# Altium PCB MainBoard.PcbDoc (part 2 of 3)
Units mil, origin at the board's own origin, x right, y up, seen from the top; angles counter-clockwise.
Board outline 11417.32 x 3858.27 mil, 2 copper layers (Top Layer, Bottom Layer); 222 components, 205 nets, 1642 pads, 0 vias.
Unrouted connection lines stored in the file: 802.
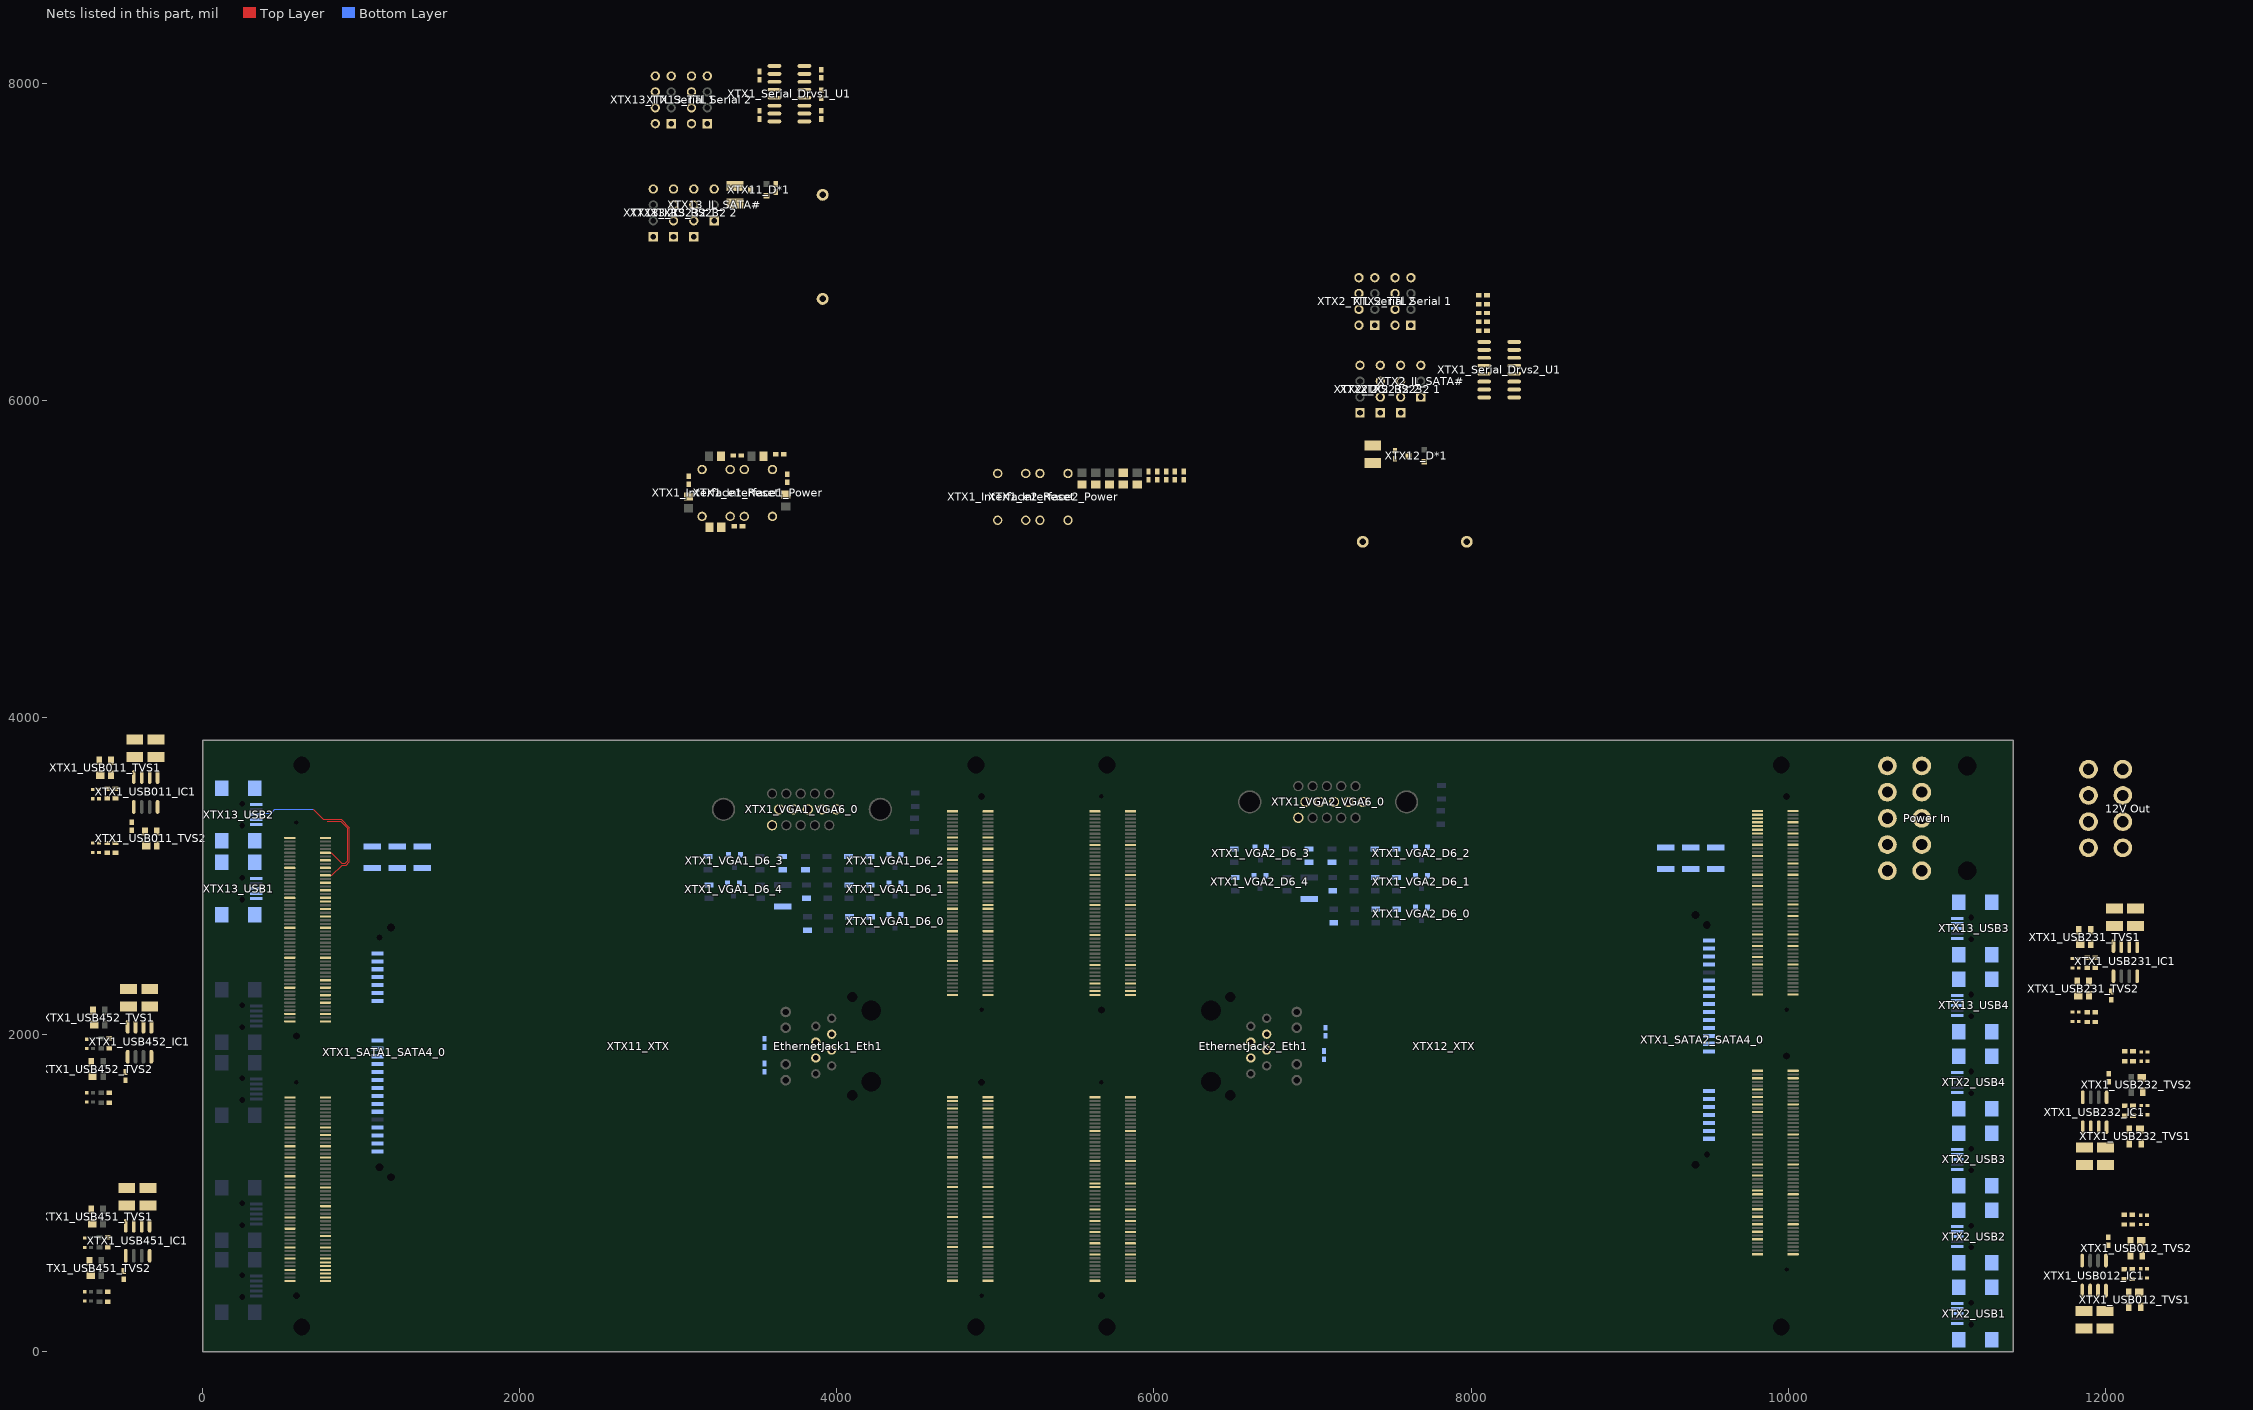
[diagram p2: the nets of this part, all layers, seen from the top]

## Components (designator, comment, footprint, x,y, rotation, side; value= is the part's Value field where it differs from the comment) (continued)
XTX13_USB1 "UX60-MB-5ST" UX60-MB-5ST 378,2922.48 r90 bottom (schematic designator USB1)
XTX13_USB2 "UX60-MB-5ST" UX60-MB-5ST 378,3389.15 r90 bottom (schematic designator USB2)
XTX13_USB3 "UX60-MB-5ST" UX60-MB-5ST 11025.75,2670.85 r270 bottom (schematic designator USB3)
XTX13_USB4 "UX60-MB-5ST" UX60-MB-5ST 11025.75,2185.14 r270 bottom (schematic designator USB4)
XTX13_USB5 "UX60-MB-5ST" UX60-MB-5ST 378,415.82 r90 bottom (schematic designator USB5)
XTX13_USB6 "UX60-MB-5ST" UX60-MB-5ST 378,869.15 r90 bottom (schematic designator USB6)

## Footprints (in the part's own frame and the unit in brackets; to place one, negate y for a bottom-side part, rotate by r counter-clockwise, add the part's x,y. Pads: shape width x height; smd on the part's side, far side on the other; paste and mask are expansions set on the pad)
"8-Pin SOIC" [mm] "SOIC, 8-Leads, Body 6.0x4.0mm (max), Pitch 1.27mm, IPC Medium Density"
  oval 2.2x0.6 smd: 1(-2.4,1.905) 2(-2.4,0.635) 3(-2.4,-0.635) 4(-2.4,-1.905) 5(2.4,-1.905) 6(2.4,-0.635) 7(2.4,0.635) 8(2.4,1.905)
  silkscreen extent -2.79,-3 1.91,3, body extent -1.99,-2.99 1.99,2.99, height 1.73
"8-POS 5569 Mini-Fit Jr 2" [mm] "Right Angle w/ Press-Fit Pegs"
  round 3 hole 1.8: 1(0,0) 2(4.2,0) 3(8.4,0) 4(12.6,0) 5(0,5.5) 6(4.2,5.5) 7(8.4,5.5) 8(12.6,5.5)
  round 0 hole 3 unplated: ""(0,-7.3) ""(12.6,-7.3)
  silkscreen extent -2.83,-14.1 15.9,7.25, body extent -2.65,-13.95 15.75,5.99, height 11.4
"10-Pos 5569 Mini-Fit Jr 2" [mm] "Right Angle w/ Press-Fit Pegs"
  round 3 hole 1.8: 1(0,0) 2(4.2,0) 3(8.4,0) 4(12.6,0) 5(16.8,0) 6(0,5.5) 7(4.2,5.5) 8(8.4,5.5) 9(12.6,5.5) 10(16.8,5.5)
  round 0 hole 3 unplated: ""(0,-7.3) ""(16.8,-7.3)
  silkscreen extent -3,-14 20.2,7.5, body extent -2.7,-13.87 19.9,6.07, height 11.4
0402 [mm] "Chip Capacitor; Body 1.0 x 0.5 mm (LxW typ)"
  rect 0.9x0.7 smd: 1(-0.65,0) 2(0.65,0)
  silkscreen extent -1.4,-0.25 -1.4,0.25
0402-A [mm] "Chip Inductor; Body 1 x 0.5 mm (LxW typ)"
  rect 0.6x0.5 smd: 1(-0.5,0) 2(0.5,0)
  silkscreen extent -1.1,-0.15 -1.1,0.15
"0805 (2012) Capacitor" [mm] "0805 (2012) Capacitor"
  rect 0.85x1.4 smd: 1(-1.075,0) 2(1.075,0)
  silkscreen extent -1.78,-0.95 1.78,0.95, body extent -1.19,-0.65 1.19,0.65, height 0.85
1005[0402] [mm] "Chip Resistor; Body 1.1 x 0.5 mm (LxW typ)"
  rect 0.9x0.7 smd: 1(-0.65,0) 2(0.65,0)
"1210 (3225) Capacitor" [mm] "1210 (3225) Capacitor"
  rect 0.95x2.8 smd: 1(-1.725,0) 2(1.725,0)
  silkscreen extent -2.45,-1.63 2.45,1.65, body extent -1.83,-1.43 1.83,1.43, height 1.81
48025-0002 [mm] "Modular RJ45 Jack w/ Magnetics & LEDs"
  round 1.5 hole 0.89: 1(-4.445,0) 2(-3.175,2.54) 3(-1.905,0) 4(-0.635,2.54) 5(0.635,0) 6(1.905,2.54) 7(3.175,0) 8(4.445,2.54)
  round 1.7 hole 1.02: 9(-5.461,7.366) 10(-2.921,7.366) 11(2.921,7.366) 12(5.461,7.366)
  round 0 hole 1.63 unplated: ""(-7.874,-3.302) ""(7.874,-3.302)
  round 0 hole 3.18 unplated: ""(-5.715,-6.35) ""(5.715,-6.35)
  silkscreen extent -9,-16.37 9,9, body extent -9.13,-16.5 9.13,9.13, height 14.9
BH600 [mil] "16mm Battery Holder"
  round 75 hole 42: +(-1,-425) -(-1,231)
  silkscreen extent -375,-545 375,375, body extent -375,-545 375,375, height 330
C0805 [mm] "Chip Capacitor; Body 2.0 x 1.2 mm (LxW typ)"
  rect 1.3x1.5 smd: 1(-0.95,0) 2(0.95,0)
  silkscreen extent -1.9,-0.65 -1.9,0.65
C1210 [mm] "Chip Capacitor; Body 3.2 x 2.5 mm (LxW typ)"
  rect 1.6x2.7 smd: 1(-1.4,0) 2(1.4,0)
  silkscreen extent -0.3,-1.25 0.3,1.25
DSub15 [mil] "3 Row 15 Pin Female Right Angle Connector Tyco PN 1734344"
  round 65 hole 46.85: 1(-172.44,-100) 2(-82.28,-100) 3(7.87,-100) 4(98.03,-100) 5(188.19,-100) 6(-217.32,0) 7(-127.17,0) 8(-37.01,0) 9(53.15,0) 10(143.31,0) 11(-172.44,100) 12(-82.28,100) 13(7.87,100) 14(98.03,100) 15(188.19,100)
  round 147 hole 126.77: CGND(-494.49,0) CGND(494.49,0)
  silkscreen extent -606,-177 606,811, body extent -606,-177 606,689, height 502
FSM4JH [mm]
  round 1.5 hole 0.99: 1(-3.75,-2.25) 2(3.75,-2.25) 3(-3.75,2.25) 4(3.75,2.25)
  silkscreen extent -3,-3 3,3, body extent -3.13,-3.13 3.13,3.13, height 5
HDR1X3 [mm] "Connector; Header; 3 Position"
  rect 1.5x1.5 hole 0.9: 1(0,0)
  round 1.5 hole 0.9: 2(2.54,0) 3(5.08,0)
  silkscreen extent -1.27,-1.27 6.35,1.27
HDR1X4 [mm] "Connector; Header; 4 Position"
  rect 1.5x1.5 hole 0.9: 1(0,0)
  round 1.5 hole 0.9: 2(2.54,0) 3(5.08,0) 4(7.62,0)
  silkscreen extent -1.27,-1.27 8.89,1.27
HDR2X4 [mm] "Connector; Header; 4x2 Position"
  rect 1.5x1.5 hole 0.9: 1(0,0)
  round 1.5 hole 0.9: 2(0,2.54) 3(2.54,0) 4(2.54,2.54) 5(5.08,0) 6(5.08,2.54) 7(7.62,0) 8(7.62,2.54)
  silkscreen extent -1.27,-1.27 8.89,3.81
NSO16_N [mm] "16-Pin Small Outline Integrated Circuit 1.27 mm Pitch, IPC Medium Density"
  oval 2.2x0.6 smd: 1(-2.4,4.445) 2(-2.4,3.175) 3(-2.4,1.905) 4(-2.4,0.635) 5(-2.4,-0.635) 6(-2.4,-1.905) 7(-2.4,-3.175) 8(-2.4,-4.445) 9(2.4,-4.445) 10(2.4,-3.175) 11(2.4,-1.905) 12(2.4,-0.635) 13(2.4,0.635) 14(2.4,1.905) 15(2.4,3.175) 16(2.4,4.445)
  silkscreen extent -2.53,-5 0.9,5.42, body extent -1.95,-4.95 1.95,4.95, height 1.75
"R 0805 (2012) RESISTOR" [mm] "0805 (2012) Resistor"
  rect 0.85x1.4 smd: 1(-1.075,0) 2(1.075,0)
  silkscreen extent -1.78,-0.95 1.78,0.95, body extent -1.19,-0.65 1.19,0.65, height 0.85
"R 1210 (3225) RESISTOR" [mm] "1210 (3225) Resistor"
  rect 0.95x2.8 smd: 1(-1.725,0) 2(1.725,0)
  silkscreen extent -2.45,-1.63 2.45,1.65, body extent -1.83,-1.43 1.83,1.43, height 1.81
"SATA HDD" [mm] "FCI Part# 10029364 With HDD Holes and Screen"
  rect 1.9x0.65 smd: P1(-16.659,26.095) P2(-16.659,27.365) P3(-16.659,28.635) P4(-16.659,29.905) P5(-16.659,31.175) P6(-16.659,32.445) P7(-16.659,33.715) P8(-16.659,34.985) P9(-16.659,36.255) P10(-16.659,37.525) P11(-16.659,38.795) P12(-16.659,40.065) P13(-16.659,41.335) P14(-16.659,42.605) P15(-16.659,43.875) S1(-16.65,12.155) S2(-16.65,13.425) S3(-16.65,14.695) S4(-16.65,15.965) S5(-16.65,17.235) S6(-16.65,18.505) S7(-16.65,19.775)
  round 0 hole 0.95 unplated: ""(-16.3,9.6)
  round 0 hole 1.25 unplated: ""(-16.3,46.4) ""(-14.5,8) ""(-14.5,48)
  silkscreen extent -19.52,0 19.5,54, body extent -19.5,0 19.5,54, height 5.45
SOT23 [mm]
  rect 0.8x0.9 smd: 1(0.95,1) 2(-0.95,1) 3(0,-1)
  silkscreen extent -1.53,-0.7 1.53,0.7, body extent -1.52,-0.7 1.52,0.7, height 1.11
SOT143 [mm] "SOT-143; 4 Leads; Body 3 x 2.6 mm, inc. leads (LxW max)"
  rect 1.35x1.35 smd: 1(-0.75,-1.1)
  rect 0.9x1.35 smd: 2(0.95,-1.1) 3(0.95,1.1) 4(-0.95,1.1)
  silkscreen extent -1.87,-2.22 1.75,0.7
SOT-23 [mm] "SOT-23; 3 Leads; Body 3.0 x 2.6 mm, inc. leads (LxW max)"
  rect 0.9x0.95 smd: 1(-0.95,-1.25) 2(0.95,-1.25) 3(0,1.25)
  silkscreen extent -2.07,-1.38 1.3,1.25
UX60-MB-5ST [mm] "miniUSB Type B Connector - Metal Shield SMT With Positioning Post"
  rect 0.5x2 smd: 1(-1.6,-1) 2(-0.8,-1) 3(0,-1) 4(0.8,-1) 5(1.6,-1)
  rect 0x0 hole 0.9 unplated: 11(1.75,-3.25) 12(-1.75,-3.25)
  rect 2.5x2.2 smd: CGND(-4.2,-6.55) CGND(-4.2,-1.25) CGND(4.2,-6.55) CGND(4.2,-1.25)
  silkscreen extent -3.85,-9.72 3.85,-0.77, body extent -4.95,-9.55 4.95,-0.55, height 3.94
XTX_Board [mm]
  round 0 hole 0.7 unplated: 0(-111.85,41.65) 0(-111.85,87.45) 0(-2.025,53.25) 0(-2,11.65)
  round 0 hole 1.1 unplated: 0(-111.8,7.45) 0(-111.8,53.25) 0(-2.075,87.45) 0(-2.05,45.85)
  round 0 hole 2.7 unplated: 0(-110.9,2.45) 0(-110.9,92.45) 0(-2.9,92.45) 0(-2.9,2.45)
  rrect50% 1.8x0.35 smd: 1(-1,43.5) 2(-6.7,43.5) 3(-1,42.9) 4(-6.7,42.9) 5(-1,42.3) 6(-6.7,42.3) 7(-1,41.7) 8(-6.7,41.7) 9(-1,41.1) 10(-6.7,41.1) 11(-1,40.5) 12(-6.7,40.5) 13(-1,39.9) 14(-6.7,39.9) 15(-1,39.3) 16(-6.7,39.3) 17(-1,38.7) 18(-6.7,38.7) 19(-1,38.1) 20(-6.7,38.1) 21(-1,37.5) 22(-6.7,37.5) 23(-1,36.9) 24(-6.7,36.9) 25(-1,36.3) 26(-6.7,36.3) 27(-1,35.7) 28(-6.7,35.7) 29(-1,35.1) 30(-6.7,35.1) 31(-1,34.5) 32(-6.7,34.5) 33(-1,33.9) 34(-6.7,33.9) 35(-1,33.3) 36(-6.7,33.3) 37(-1,32.7) 38(-6.7,32.7) 39(-1,32.1) 40(-6.7,32.1) 41(-1,31.5) 42(-6.7,31.5) 43(-1,30.9) 44(-6.7,30.9) 45(-1,30.3) 46(-6.7,30.3) 47(-1,29.7) 48(-6.7,29.7) 49(-1,29.1) 50(-6.7,29.1) 51(-1,28.5) 52(-6.7,28.5) 53(-1,27.9) 54(-6.7,27.9) 55(-1,27.3) 56(-6.7,27.3) 57(-1,26.7) 58(-6.7,26.7) 59(-1,26.1) 60(-6.7,26.1) 61(-1,25.5) 62(-6.7,25.5) 63(-1,24.9) 64(-6.7,24.9) 65(-1,24.3) 66(-6.7,24.3) 67(-1,23.7) 68(-6.7,23.7) 69(-1,23.1) 70(-6.7,23.1) 71(-1,22.5) 72(-6.7,22.5) 73(-1,21.9) 74(-6.7,21.9) 75(-1,21.3) 76(-6.7,21.3) 77(-1,20.7) 78(-6.7,20.7) 79(-1,20.1) 80(-6.7,20.1) 81(-1,19.5) 82(-6.7,19.5) 83(-1,18.9) 84(-6.7,18.9) 85(-1,18.3) 86(-6.7,18.3) 87(-1,17.7) 88(-6.7,17.7) 89(-1,17.1) 90(-6.7,17.1) 91(-1,16.5) 92(-6.7,16.5) 93(-1,15.9) 94(-6.7,15.9) 95(-1,15.3) 96(-6.7,15.3) 97(-1,14.7) 98(-6.7,14.7) 99(-1,14.1) 100(-6.7,14.1) 101(-1.025,85.1) 102(-6.725,85.1) 103(-1.025,84.5) 104(-6.725,84.5) 105(-1.025,83.9) 106(-6.725,83.9) 107(-1.025,83.3) 108(-6.725,83.3) 109(-1.025,82.7) 110(-6.725,82.7) 111(-1.025,82.1) 112(-6.725,82.1) 113(-1.025,81.5) 114(-6.725,81.5) 115(-1.025,80.9) 116(-6.725,80.9) 117(-1.025,80.3) 118(-6.725,80.3) 119(-1.025,79.7) 120(-6.725,79.7) 121(-1.025,79.1) 122(-6.725,79.1) 123(-1.025,78.5) 124(-6.725,78.5) 125(-1.025,77.9) 126(-6.725,77.9) 127(-1.025,77.3) 128(-6.725,77.3) 129(-1.025,76.7) 130(-6.725,76.7) 131(-1.025,76.1) 132(-6.725,76.1) 133(-1.025,75.5) 134(-6.725,75.5) 135(-1.025,74.9) 136(-6.725,74.9) 137(-1.025,74.3) 138(-6.725,74.3) 139(-1.025,73.7) 140(-6.725,73.7) 141(-1.025,73.1) 142(-6.725,73.1) 143(-1.025,72.5) 144(-6.725,72.5) 145(-1.025,71.9) 146(-6.725,71.9) 147(-1.025,71.3) 148(-6.725,71.3) 149(-1.025,70.7) 150(-6.725,70.7) 151(-1.025,70.1) 152(-6.725,70.1) 153(-1.025,69.5) 154(-6.725,69.5) 155(-1.025,68.9) 156(-6.725,68.9) 157(-1.025,68.3) 158(-6.725,68.3) 159(-1.025,67.7) 160(-6.725,67.7) 161(-1.025,67.1) 162(-6.725,67.1) 163(-1.025,66.5) 164(-6.725,66.5) 165(-1.025,65.9) 166(-6.725,65.9) 167(-1.025,65.3) 168(-6.725,65.3) 169(-1.025,64.7) 170(-6.725,64.7) 171(-1.025,64.1) 172(-6.725,64.1) 173(-1.025,63.5) 174(-6.725,63.5) 175(-1.025,62.9) 176(-6.725,62.9) 177(-1.025,62.3) 178(-6.725,62.3) 179(-1.025,61.7) 180(-6.725,61.7) 181(-1.025,61.1) 182(-6.725,61.1) 183(-1.025,60.5) 184(-6.725,60.5) 185(-1.025,59.9) 186(-6.725,59.9) 187(-1.025,59.3) 188(-6.725,59.3) 189(-1.025,58.7) 190(-6.725,58.7) 191(-1.025,58.1) 192(-6.725,58.1) 193(-1.025,57.5) 194(-6.725,57.5) 195(-1.025,56.9) 196(-6.725,56.9) 197(-1.025,56.3) 198(-6.725,56.3) 199(-1.025,55.7) 200(-6.725,55.7) 201(-112.85,9.85) 202(-107.15,9.85) 203(-112.85,10.45) 204(-107.15,10.45) 205(-112.85,11.05) 206(-107.15,11.05) 207(-112.85,11.65) 208(-107.15,11.65) 209(-112.85,12.25) 210(-107.15,12.25) 211(-112.85,12.85) 212(-107.15,12.85) 213(-112.85,13.45) 214(-107.15,13.45) 215(-112.85,14.05) 216(-107.15,14.05) 217(-112.85,14.65) 218(-107.15,14.65) 219(-112.85,15.25) 220(-107.15,15.25) 221(-112.85,15.85) 222(-107.15,15.85) 223(-112.85,16.45) 224(-107.15,16.45) 225(-112.85,17.05) 226(-107.15,17.05) 227(-112.85,17.65) 228(-107.15,17.65) 229(-112.85,18.25) 230(-107.15,18.25) 231(-112.85,18.85) 232(-107.15,18.85) 233(-112.85,19.45) 234(-107.15,19.45) 235(-112.85,20.05) 236(-107.15,20.05) 237(-112.85,20.65) 238(-107.15,20.65) 239(-112.85,21.25) 240(-107.15,21.25) 241(-112.85,21.85) 242(-107.15,21.85) 243(-112.85,22.45) 244(-107.15,22.45) 245(-112.85,23.05) 246(-107.15,23.05) 247(-112.85,23.65) 248(-107.15,23.65) 249(-112.85,24.25) 250(-107.15,24.25) 251(-112.85,24.85) 252(-107.15,24.85) 253(-112.85,25.45) 254(-107.15,25.45) 255(-112.85,26.05) 256(-107.15,26.05) 257(-112.85,26.65) 258(-107.15,26.65) 259(-112.85,27.25) 260(-107.15,27.25) 261(-112.85,27.85) 262(-107.15,27.85) 263(-112.85,28.45) 264(-107.15,28.45) 265(-112.85,29.05) 266(-107.15,29.05) 267(-112.85,29.65) 268(-107.15,29.65) 269(-112.85,30.25) 270(-107.15,30.25) 271(-112.85,30.85) 272(-107.15,30.85) 273(-112.85,31.45) 274(-107.15,31.45) 275(-112.85,32.05) 276(-107.15,32.05) 277(-112.85,32.65) 278(-107.15,32.65) 279(-112.85,33.25) 280(-107.15,33.25) 281(-112.85,33.85) 282(-107.15,33.85) 283(-112.85,34.45) 284(-107.15,34.45) 285(-112.85,35.05) 286(-107.15,35.05) 287(-112.85,35.65) 288(-107.15,35.65) 289(-112.85,36.25) 290(-107.15,36.25) 291(-112.85,36.85) 292(-107.15,36.85) 293(-112.85,37.45) 294(-107.15,37.45) 295(-112.85,38.05) 296(-107.15,38.05) 297(-112.85,38.65) 298(-107.15,38.65) 299(-112.85,39.25) 300(-107.15,39.25) 301(-112.85,55.65) 302(-107.15,55.65) 303(-112.85,56.25) 304(-107.15,56.25) 305(-112.85,56.85) 306(-107.15,56.85) 307(-112.85,57.45) 308(-107.15,57.45) 309(-112.85,58.05) 310(-107.15,58.05) 311(-112.85,58.65) 312(-107.15,58.65) 313(-112.85,59.25) 314(-107.15,59.25) 315(-112.85,59.85) 316(-107.15,59.85) 317(-112.85,60.45) 318(-107.15,60.45) 319(-112.85,61.05) 320(-107.15,61.05) 321(-112.85,61.65) 322(-107.15,61.65) 323(-112.85,62.25) 324(-107.15,62.25) 325(-112.85,62.85) 326(-107.15,62.85) 327(-112.85,63.45) 328(-107.15,63.45) 329(-112.85,64.05) 330(-107.15,64.05) 331(-112.85,64.65) 332(-107.15,64.65) 333(-112.85,65.25) 334(-107.15,65.25) 335(-112.85,65.85) 336(-107.15,65.85) 337(-112.85,66.45) 338(-107.15,66.45) 339(-112.85,67.05) 340(-107.15,67.05) 341(-112.85,67.65) 342(-107.15,67.65) 343(-112.85,68.25) 344(-107.15,68.25) 345(-112.85,68.85) 346(-107.15,68.85) 347(-112.85,69.45) 348(-107.15,69.45) 349(-112.85,70.05) 350(-107.15,70.05) 351(-112.85,70.65) 352(-107.15,70.65) 353(-112.85,71.25) 354(-107.15,71.25) 355(-112.85,71.85) 356(-107.15,71.85) 357(-112.85,72.45) 358(-107.15,72.45) 359(-112.85,73.05) 360(-107.15,73.05) 361(-112.85,73.65) 362(-107.15,73.65) 363(-112.85,74.25) 364(-107.15,74.25) 365(-112.85,74.85) 366(-107.15,74.85) 367(-112.85,75.45) 368(-107.15,75.45) 369(-112.85,76.05) 370(-107.15,76.05) 371(-112.85,76.65) 372(-107.15,76.65) 373(-112.85,77.25) 374(-107.15,77.25) 375(-112.85,77.85) 376(-107.15,77.85) 377(-112.85,78.45) 378(-107.15,78.45) 379(-112.85,79.05) 380(-107.15,79.05) 381(-112.85,79.65) 382(-107.15,79.65) 383(-112.85,80.25) 384(-107.15,80.25) 385(-112.85,80.85) 386(-107.15,80.85) 387(-112.85,81.45) 388(-107.15,81.45) 389(-112.85,82.05) 390(-107.15,82.05) 391(-112.85,82.65) 392(-107.15,82.65) 393(-112.85,83.25) 394(-107.15,83.25) 395(-112.85,83.85) 396(-107.15,83.85) 397(-112.85,84.45) 398(-107.15,84.45) 399(-112.85,85.05) 400(-107.15,85.05)
  silkscreen extent -113.9,-0.05 0.1,94.95, body extent -114,0 0,95, height 19.2

## Part data
EthernetJack1_C25 EthernetJack1_C26 EthernetJack2_C25 EthernetJack2_C26 XTX1_Serial_Drvs1_C20 XTX1_Serial_Drvs1_C21 XTX1_Serial_Drvs1_C22 XTX1_Serial_Drvs1_C23 XTX1_Serial_Drvs1_C24 XTX1_Serial_Drvs2_C20 XTX1_Serial_Drvs2_C21 XTX1_Serial_Drvs2_C22 XTX1_Serial_Drvs2_C23 XTX1_Serial_Drvs2_C24 XTX1_USB011_C1 XTX1_USB011_C2 XTX1_USB011_C3 XTX1_USB011_C4 XTX1_USB011_C5 XTX1_USB011_C6 XTX1_USB011_C7 XTX1_USB012_C1 XTX1_USB012_C2 XTX1_USB012_C3 XTX1_USB012_C4 XTX1_USB012_C5 XTX1_USB012_C6 XTX1_USB012_C7 XTX1_USB231_C1 XTX1_USB231_C2 XTX1_USB231_C3 XTX1_USB231_C4 XTX1_USB231_C5 XTX1_USB231_C6 XTX1_USB231_C7 XTX1_USB232_C1 XTX1_USB232_C2 XTX1_USB232_C3 XTX1_USB232_C4 XTX1_USB232_C5 XTX1_USB232_C6 XTX1_USB232_C7 XTX1_USB451_C1 XTX1_USB451_C2 XTX1_USB451_C3 XTX1_USB451_C4 XTX1_USB451_C5 XTX1_USB451_C6 XTX1_USB451_C7 XTX1_USB452_C1 XTX1_USB452_C2 XTX1_USB452_C3 XTX1_USB452_C4 XTX1_USB452_C5 XTX1_USB452_C6 XTX1_USB452_C7 XTX11_C16 XTX12_C16: "Capacitor (Semiconductor SIM Model)"
EthernetJack1_Eth1 EthernetJack2_Eth1: "Modular RJ45 Jack w/ Magnetics & LEDs"
XTX1_Interface1_5V "XTX1_Interface1_Eth Act" "XTX1_Interface1_Eth Lil" "XTX1_Interface1_Eth Spd" XTX1_Interface1_SATA XTX1_Interface2_5V "XTX1_Interface2_Eth Act" "XTX1_Interface2_Eth Lil" "XTX1_Interface2_Eth Spd" XTX1_Interface2_SATA: "Typical RED, GREEN, YELLOW, AMBER GaAs LED"
XTX1_Interface1_Power XTX1_Interface1_Reset XTX1_Interface2_Power XTX1_Interface2_Reset: "FSM 6mm Series Switch"
XTX1_Interface1_R14 XTX1_Interface1_R15 XTX1_Interface1_R16 XTX1_Interface1_R17 XTX1_Interface1_R18 XTX1_Interface2_R14 XTX1_Interface2_R15 XTX1_Interface2_R16 XTX1_Interface2_R17 XTX1_Interface2_R18 XTX11_R8 XTX12_R8: "Semiconductor Resistor"
XTX1_SATA1_C4_0 XTX1_SATA1_C4_1 XTX1_SATA1_C4_2 XTX1_SATA2_C4_0 XTX1_SATA2_C4_1 XTX1_SATA2_C4_2 XTX1_VGA1_C6_0 XTX1_VGA1_C6_1 XTX1_VGA1_C6_2 XTX1_VGA1_C6_3 XTX1_VGA1_C6_4 XTX1_VGA1_C6_5 XTX1_VGA1_C6_6 XTX1_VGA1_C6_7 XTX1_VGA2_C6_0 XTX1_VGA2_C6_1 XTX1_VGA2_C6_2 XTX1_VGA2_C6_3 XTX1_VGA2_C6_4 XTX1_VGA2_C6_5 XTX1_VGA2_C6_6 XTX1_VGA2_C6_7: library part "Capacitor (non-polarized)", "Capacitor"
XTX1_SATA1_SATA4_0 XTX1_SATA2_SATA4_0: "SATA HDD, FCI Part# 10029364"
XTX1_Serial_Drvs1_U1 XTX1_Serial_Drvs2_U1: "+5V Powered, Multi-Channel RS-232 Driver/Receiver"
XTX1_USB011_IC1 XTX1_USB012_IC1 XTX1_USB231_IC1 XTX1_USB232_IC1 XTX1_USB451_IC1 XTX1_USB452_IC1: library part MIC2026, "Micrel MIC2026 Dual-Channel Power Distribution Switch"
XTX1_USB011_TVS1 XTX1_USB011_TVS2 XTX1_USB012_TVS1 XTX1_USB012_TVS2 XTX1_USB231_TVS1 XTX1_USB231_TVS2 XTX1_USB232_TVS1 XTX1_USB232_TVS2 XTX1_USB451_TVS1 XTX1_USB451_TVS2 XTX1_USB452_TVS1 XTX1_USB452_TVS2: "IC TVS ARRAY 2-LINE 5V SOT-143"
XTX1_VGA1_D6_0 XTX1_VGA1_D6_3 XTX1_VGA2_D6_0 XTX1_VGA2_D6_3: library part "Dual Schottky Diode", "Dual Schottky Diode"
XTX1_VGA1_FB6_0 XTX1_VGA1_FB6_1 XTX1_VGA1_FB6_2 XTX1_VGA1_FB6_3 XTX1_VGA1_FB6_4 XTX1_VGA1_FB6_5 XTX1_VGA1_FB6_6 XTX1_VGA1_FB6_7 XTX1_VGA2_FB6_0 XTX1_VGA2_FB6_1 XTX1_VGA2_FB6_2 XTX1_VGA2_FB6_3 XTX1_VGA2_FB6_4 XTX1_VGA2_FB6_5 XTX1_VGA2_FB6_6 XTX1_VGA2_FB6_7: library part "Ferrite Beads", "Ferrite Beads"
XTX1_VGA1_R6_0 XTX1_VGA1_R6_1 XTX1_VGA1_R6_2 XTX1_VGA1_R6_3 XTX1_VGA2_R6_0 XTX1_VGA2_R6_1 XTX1_VGA2_R6_2 XTX1_VGA2_R6_3: library part Resistor, "Resistor"
XTX1_VGA1_VGA6_0 XTX1_VGA2_VGA6_0: "DSub15 Connector Tyco PN 1734344"
XTX2_I2C "XTX2_RS232 1" "XTX2_RS232 2" XTX13_I2C "XTX13_RS232 1" "XTX13_RS232 2": "Header, 4-Pin"
XTX2_IL_SATA# XTX13_IL_SATA#: "Header, 3-Pin"
"XTX2_TTL Serial 1" "XTX2_TTL Serial 2" "XTX13_TTL Serial 1" "XTX13_TTL Serial 2": "Header, 4-Pin, Dual row"
XTX2_USB1 XTX2_USB2 XTX2_USB3 XTX2_USB4 XTX2_USB5 XTX2_USB6 XTX13_USB1 XTX13_USB2 XTX13_USB3 XTX13_USB4 XTX13_USB5 XTX13_USB6: "miniUSB Type B SMT Connector"
XTX11_BATT1 XTX12_BATT1: "16mm Battery Holder - Memory Protection Devices"
XTX11_D*1 XTX12_D*1: "Dual Surface Mount Switching Diode"

## Nets (pads, with @x,y where several pads share a name; then routed paths per layer and width w, separated by ;. In a path a pad name is that pad's centre, name@x,y a point inside that pad or via, vN(x,y) a via of type N, cw(c..) or ccw(c..) an arc to the next point about the centre after c; other vN are vias at no path point)
3.3VCC: XTX1_SATA1_C4_0.2 XTX1_SATA1_C4_1.2 XTX1_SATA1_C4_2.2 XTX1_SATA1_SATA4_0.P1 XTX1_SATA1_SATA4_0.P2 XTX1_SATA1_SATA4_0.P3 XTX1_SATA2_C4_0.2 XTX1_SATA2_C4_1.2 XTX1_SATA2_C4_2.2 XTX1_SATA2_SATA4_0.P1 XTX1_SATA2_SATA4_0.P2 XTX1_SATA2_SATA4_0.P3 XTX1_VGA1_D6_0.2 XTX1_VGA1_D6_1.2 XTX1_VGA1_D6_2.2 XTX1_VGA1_D6_3.2 XTX1_VGA1_D6_4.2 XTX1_VGA1_FB6_3.1 XTX1_VGA2_D6_0.2 XTX1_VGA2_D6_1.2 XTX1_VGA2_D6_2.2 XTX1_VGA2_D6_3.2 XTX1_VGA2_D6_4.2 XTX1_VGA2_FB6_3.1 XTX11_XTX.12 XTX11_XTX.16 XTX11_XTX.24 XTX12_XTX.12 XTX12_XTX.16 XTX12_XTX.24
5VCC: XTX1_Interface1_5V.1 XTX1_Interface1_R14.1 XTX1_Interface1_R15.1 XTX1_Interface1_R16.1 XTX1_Interface1_R17.1 XTX1_Interface2_5V.1 XTX1_Interface2_R14.1 XTX1_Interface2_R15.1 XTX1_Interface2_R16.1 XTX1_Interface2_R17.1 XTX1_SATA1_SATA4_0.P7 XTX1_SATA1_SATA4_0.P8 XTX1_SATA1_SATA4_0.P9 XTX1_SATA2_SATA4_0.P7 XTX1_SATA2_SATA4_0.P8 XTX1_SATA2_SATA4_0.P9 XTX1_Serial_Drvs1_C22.1 XTX1_Serial_Drvs1_C23.1 XTX1_Serial_Drvs1_U1.16 XTX1_Serial_Drvs2_C22.1 XTX1_Serial_Drvs2_C23.1 XTX1_Serial_Drvs2_U1.16 XTX11_XTX.19 XTX11_XTX.20 XTX11_XTX.51 XTX11_XTX.52 XTX11_XTX.83 XTX11_XTX.84 XTX11_XTX.114 XTX11_XTX.119 XTX11_XTX.120 XTX11_XTX.151 XTX11_XTX.152 XTX11_XTX.174 XTX11_XTX.180 XTX11_XTX.183 XTX11_XTX.184 XTX11_XTX.239 XTX11_XTX.240 XTX11_XTX.251 XTX11_XTX.253 XTX11_XTX.281 XTX11_XTX.282 XTX11_XTX.303 XTX11_XTX.317 XTX11_XTX.318 XTX11_XTX.349 XTX11_XTX.350 XTX11_XTX.381 XTX11_XTX.382 XTX12_XTX.19 XTX12_XTX.20 XTX12_XTX.51 XTX12_XTX.52 XTX12_XTX.83 XTX12_XTX.84 XTX12_XTX.114 XTX12_XTX.119 XTX12_XTX.120 XTX12_XTX.151 XTX12_XTX.152 XTX12_XTX.174 XTX12_XTX.180 XTX12_XTX.183 XTX12_XTX.184 XTX12_XTX.239 XTX12_XTX.240 XTX12_XTX.251 XTX12_XTX.253 XTX12_XTX.281 XTX12_XTX.282 XTX12_XTX.303 XTX12_XTX.317 XTX12_XTX.318 XTX12_XTX.349 XTX12_XTX.350 XTX12_XTX.381 XTX12_XTX.382
12VCC: "12V Out.1" "12V Out.2" "12V Out.3" "12V Out.4" "Power In.1" "Power In.6" XTX1_SATA1_SATA4_0.P13 XTX1_SATA1_SATA4_0.P14 XTX1_SATA1_SATA4_0.P15 XTX1_SATA2_SATA4_0.P13 XTX1_SATA2_SATA4_0.P14 XTX1_SATA2_SATA4_0.P15
GND: "12V Out.5" "12V Out.6" "12V Out.7" "12V Out.8" "Power In.4" "Power In.5" "Power In.9" "Power In.10" "XTX2_RS232 1.4" "XTX2_RS232 2.4" "XTX2_TTL Serial 1.7" "XTX2_TTL Serial 1.8" "XTX2_TTL Serial 2.7" "XTX2_TTL Serial 2.8" "XTX13_RS232 1.4" "XTX13_RS232 2.4" "XTX13_TTL Serial 1.7" "XTX13_TTL Serial 1.8" "XTX13_TTL Serial 2.7" "XTX13_TTL Serial 2.8" EthernetJack1_C25.1 EthernetJack1_C26.1 EthernetJack1_Eth1.4 EthernetJack1_Eth1.5 EthernetJack2_C25.1 EthernetJack2_C26.1 EthernetJack2_Eth1.4 EthernetJack2_Eth1.5 XTX1_Interface1_Power.3 XTX1_Interface1_Power.4 XTX1_Interface1_R18.1 XTX1_Interface1_Reset.3 XTX1_Interface1_Reset.4 XTX1_Interface2_Power.3 XTX1_Interface2_Power.4 XTX1_Interface2_R18.1 XTX1_Interface2_Reset.3 XTX1_Interface2_Reset.4 XTX1_SATA1_C4_0.1 XTX1_SATA1_C4_1.1 XTX1_SATA1_C4_2.1 XTX1_SATA1_SATA4_0.P4 XTX1_SATA1_SATA4_0.P5 XTX1_SATA1_SATA4_0.P6 XTX1_SATA1_SATA4_0.P10 XTX1_SATA1_SATA4_0.P12 XTX1_SATA1_SATA4_0.S1 XTX1_SATA1_SATA4_0.S4 XTX1_SATA1_SATA4_0.S7 XTX1_SATA2_C4_0.1 XTX1_SATA2_C4_1.1 XTX1_SATA2_C4_2.1 XTX1_SATA2_SATA4_0.P4 XTX1_SATA2_SATA4_0.P5 XTX1_SATA2_SATA4_0.P6 XTX1_SATA2_SATA4_0.P10 XTX1_SATA2_SATA4_0.P12 XTX1_SATA2_SATA4_0.S1 XTX1_SATA2_SATA4_0.S4 XTX1_SATA2_SATA4_0.S7 XTX1_Serial_Drvs1_C23.2 XTX1_Serial_Drvs1_C24.2 XTX1_Serial_Drvs1_U1.15 XTX1_Serial_Drvs2_C23.2 XTX1_Serial_Drvs2_C24.2 XTX1_Serial_Drvs2_U1.15 XTX1_USB011_C1.1 XTX1_USB011_C2.1 XTX1_USB011_C3.1 XTX1_USB011_C4.1 XTX1_USB011_C5.1 XTX1_USB011_C6.1 XTX1_USB011_C7.1 XTX1_USB011_IC1.6 XTX1_USB011_L2.1 XTX1_USB011_L4.1 XTX1_USB011_TVS1.1 XTX1_USB011_TVS2.4 XTX1_USB012_C1.1 XTX1_USB012_C2.1 XTX1_USB012_C3.1 XTX1_USB012_C4.1 XTX1_USB012_C5.1 XTX1_USB012_C6.1 XTX1_USB012_C7.1 XTX1_USB012_IC1.6 XTX1_USB012_L2.1 XTX1_USB012_L4.1 XTX1_USB012_TVS1.1 XTX1_USB012_TVS2.4 XTX1_USB231_C1.1 XTX1_USB231_C2.1 XTX1_USB231_C3.1 XTX1_USB231_C4.1 XTX1_USB231_C5.1 XTX1_USB231_C6.1 XTX1_USB231_C7.1 XTX1_USB231_IC1.6 XTX1_USB231_L2.1 XTX1_USB231_L4.1 XTX1_USB231_TVS1.1 XTX1_USB231_TVS2.4 XTX1_USB232_C1.1 XTX1_USB232_C2.1 XTX1_USB232_C3.1 XTX1_USB232_C4.1 XTX1_USB232_C5.1 XTX1_USB232_C6.1 XTX1_USB232_C7.1 XTX1_USB232_IC1.6 XTX1_USB232_L2.1 XTX1_USB232_L4.1 XTX1_USB232_TVS1.1 XTX1_USB232_TVS2.4 XTX1_USB451_C1.1 XTX1_USB451_C2.1 XTX1_USB451_C3.1 XTX1_USB451_C4.1 XTX1_USB451_C5.1 XTX1_USB451_C6.1 XTX1_USB451_C7.1 XTX1_USB451_IC1.6 XTX1_USB451_L2.1 XTX1_USB451_L4.1 XTX1_USB451_TVS1.1 XTX1_USB451_TVS2.4 XTX1_USB452_C1.1 XTX1_USB452_C2.1 XTX1_USB452_C3.1 XTX1_USB452_C4.1 XTX1_USB452_C5.1 XTX1_USB452_C6.1 XTX1_USB452_C7.1 XTX1_USB452_IC1.6 XTX1_USB452_L2.1 XTX1_USB452_L4.1 XTX1_USB452_TVS1.1 XTX1_USB452_TVS2.4 XTX1_VGA1_C6_0.2 XTX1_VGA1_C6_1.2 XTX1_VGA1_C6_2.2 XTX1_VGA1_C6_3.2 XTX1_VGA1_C6_4.2 XTX1_VGA1_C6_5.2 XTX1_VGA1_C6_6.1 XTX1_VGA1_C6_7.1 XTX1_VGA1_D6_0.1 XTX1_VGA1_D6_1.1 XTX1_VGA1_D6_2.1 XTX1_VGA1_D6_3.1 XTX1_VGA1_D6_4.1 XTX1_VGA1_R6_0.1 XTX1_VGA1_R6_1.1 XTX1_VGA1_R6_2.1 XTX1_VGA1_R6_3.1 XTX1_VGA1_VGA6_0.5 XTX1_VGA1_VGA6_0.6 XTX1_VGA1_VGA6_0.7 XTX1_VGA1_VGA6_0.8 XTX1_VGA1_VGA6_0.10 XTX1_VGA2_C6_0.2 XTX1_VGA2_C6_1.2 XTX1_VGA2_C6_2.2 XTX1_VGA2_C6_3.2 XTX1_VGA2_C6_4.2 XTX1_VGA2_C6_5.2 XTX1_VGA2_C6_6.1 XTX1_VGA2_C6_7.1 XTX1_VGA2_D6_0.1 XTX1_VGA2_D6_1.1 XTX1_VGA2_D6_2.1 XTX1_VGA2_D6_3.1 XTX1_VGA2_D6_4.1 XTX1_VGA2_R6_0.1 XTX1_VGA2_R6_1.1 XTX1_VGA2_R6_2.1 XTX1_VGA2_R6_3.1 XTX1_VGA2_VGA6_0.5 XTX1_VGA2_VGA6_0.6 XTX1_VGA2_VGA6_0.7 XTX1_VGA2_VGA6_0.8 XTX1_VGA2_VGA6_0.10 XTX2_I2C.4 XTX2_IL_SATA#.3 XTX11_BATT1.- XTX11_C16.1 XTX11_XTX.1 XTX11_XTX.2 XTX11_XTX.5 XTX11_XTX.6 XTX11_XTX.35 XTX11_XTX.36 XTX11_XTX.67 XTX11_XTX.68 XTX11_XTX.99 XTX11_XTX.100 XTX11_XTX.101 XTX11_XTX.102 XTX11_XTX.107 XTX11_XTX.108 XTX11_XTX.113 XTX11_XTX.126 XTX11_XTX.129 XTX11_XTX.135 XTX11_XTX.136 XTX11_XTX.142 XTX11_XTX.157 XTX11_XTX.167 XTX11_XTX.168 XTX11_XTX.173 XTX11_XTX.199 XTX11_XTX.200 XTX11_XTX.201 XTX11_XTX.202 XTX11_XTX.215 XTX11_XTX.216 XTX11_XTX.221 XTX11_XTX.222 XTX11_XTX.227 XTX11_XTX.228 XTX11_XTX.233 XTX11_XTX.234 XTX11_XTX.254 XTX11_XTX.265 XTX11_XTX.266 XTX11_XTX.299 XTX11_XTX.300 XTX11_XTX.301 XTX11_XTX.302 XTX11_XTX.333 XTX11_XTX.334 XTX11_XTX.365 XTX11_XTX.366 XTX11_XTX.399 XTX11_XTX.400 XTX12_BATT1.- XTX12_C16.1 XTX12_XTX.1 XTX12_XTX.2 XTX12_XTX.5 XTX12_XTX.6 XTX12_XTX.35 XTX12_XTX.36 XTX12_XTX.67 XTX12_XTX.68 XTX12_XTX.99 XTX12_XTX.100 XTX12_XTX.101 XTX12_XTX.102 XTX12_XTX.107 XTX12_XTX.108 XTX12_XTX.113 XTX12_XTX.126 XTX12_XTX.129 XTX12_XTX.135 XTX12_XTX.136 XTX12_XTX.142 XTX12_XTX.157 XTX12_XTX.167 XTX12_XTX.168 XTX12_XTX.173 XTX12_XTX.199 XTX12_XTX.200 XTX12_XTX.201 XTX12_XTX.202 XTX12_XTX.215 XTX12_XTX.216 XTX12_XTX.221 XTX12_XTX.222 XTX12_XTX.227 XTX12_XTX.228 XTX12_XTX.233 XTX12_XTX.234 XTX12_XTX.254 XTX12_XTX.265 XTX12_XTX.266 XTX12_XTX.299 XTX12_XTX.300 XTX12_XTX.301 XTX12_XTX.302 XTX12_XTX.333 XTX12_XTX.334 XTX12_XTX.365 XTX12_XTX.366 XTX12_XTX.399 XTX12_XTX.400 XTX13_I2C.4 XTX13_IL_SATA#.3
NetEthernetJack1_C25_2: EthernetJack1_C25.2 EthernetJack1_Eth1.3
NetEthernetJack1_C26_2: EthernetJack1_C26.2 EthernetJack1_Eth1.6
NetEthernetJack2_C25_2: EthernetJack2_C25.2 EthernetJack2_Eth1.3
NetEthernetJack2_C26_2: EthernetJack2_C26.2 EthernetJack2_Eth1.6
NetXTX1_Interface1_5V_2: XTX1_Interface1_5V.2 XTX1_Interface1_R18.2
"NetXTX1_Interface1_Eth Act_1": "XTX1_Interface1_Eth Act.1" XTX1_Interface1_R15.2
"NetXTX1_Interface1_Eth Lil_1": "XTX1_Interface1_Eth Lil.1" XTX1_Interface1_R16.2
"NetXTX1_Interface1_Eth Spd_1": "XTX1_Interface1_Eth Spd.1" XTX1_Interface1_R14.2
NetXTX1_Interface1_R17_2: XTX1_Interface1_R17.2 XTX1_Interface1_SATA.1
NetXTX1_Interface2_5V_2: XTX1_Interface2_5V.2 XTX1_Interface2_R18.2
"NetXTX1_Interface2_Eth Act_1": "XTX1_Interface2_Eth Act.1" XTX1_Interface2_R15.2
"NetXTX1_Interface2_Eth Lil_1": "XTX1_Interface2_Eth Lil.1" XTX1_Interface2_R16.2
"NetXTX1_Interface2_Eth Spd_1": "XTX1_Interface2_Eth Spd.1" XTX1_Interface2_R14.2
NetXTX1_Interface2_R17_2: XTX1_Interface2_R17.2 XTX1_Interface2_SATA.1
NetXTX1_Serial_Drvs1_C20_1: XTX1_Serial_Drvs1_C20.1 XTX1_Serial_Drvs1_U1.4
NetXTX1_Serial_Drvs1_C20_2: XTX1_Serial_Drvs1_C20.2 XTX1_Serial_Drvs1_U1.5
NetXTX1_Serial_Drvs1_C21_1: XTX1_Serial_Drvs1_C21.1 XTX1_Serial_Drvs1_U1.1
NetXTX1_Serial_Drvs1_C21_2: XTX1_Serial_Drvs1_C21.2 XTX1_Serial_Drvs1_U1.3
NetXTX1_Serial_Drvs1_C22_2: XTX1_Serial_Drvs1_C22.2 XTX1_Serial_Drvs1_U1.2
NetXTX1_Serial_Drvs1_C24_1: XTX1_Serial_Drvs1_C24.1 XTX1_Serial_Drvs1_U1.6
NetXTX1_Serial_Drvs2_C20_1: XTX1_Serial_Drvs2_C20.1 XTX1_Serial_Drvs2_U1.4
NetXTX1_Serial_Drvs2_C20_2: XTX1_Serial_Drvs2_C20.2 XTX1_Serial_Drvs2_U1.5
NetXTX1_Serial_Drvs2_C21_1: XTX1_Serial_Drvs2_C21.1 XTX1_Serial_Drvs2_U1.1
NetXTX1_Serial_Drvs2_C21_2: XTX1_Serial_Drvs2_C21.2 XTX1_Serial_Drvs2_U1.3
NetXTX1_Serial_Drvs2_C22_2: XTX1_Serial_Drvs2_C22.2 XTX1_Serial_Drvs2_U1.2
NetXTX1_Serial_Drvs2_C24_1: XTX1_Serial_Drvs2_C24.1 XTX1_Serial_Drvs2_U1.6
NetXTX1_USB011_C2_2: XTX1_USB011_C2.2 XTX1_USB011_IC1.5 XTX1_USB011_L1.1
NetXTX1_USB011_C3_2: XTX1_USB011_C3.2 XTX1_USB011_IC1.8 XTX1_USB011_L3.1
NetXTX1_USB012_C2_2: XTX1_USB012_C2.2 XTX1_USB012_IC1.5 XTX1_USB012_L1.1
NetXTX1_USB012_C3_2: XTX1_USB012_C3.2 XTX1_USB012_IC1.8 XTX1_USB012_L3.1
NetXTX1_USB231_C2_2: XTX1_USB231_C2.2 XTX1_USB231_IC1.5 XTX1_USB231_L1.1
NetXTX1_USB231_C3_2: XTX1_USB231_C3.2 XTX1_USB231_IC1.8 XTX1_USB231_L3.1
NetXTX1_USB232_C2_2: XTX1_USB232_C2.2 XTX1_USB232_IC1.5 XTX1_USB232_L1.1
NetXTX1_USB232_C3_2: XTX1_USB232_C3.2 XTX1_USB232_IC1.8 XTX1_USB232_L3.1
NetXTX1_USB451_C2_2: XTX1_USB451_C2.2 XTX1_USB451_IC1.5 XTX1_USB451_L1.1
NetXTX1_USB451_C3_2: XTX1_USB451_C3.2 XTX1_USB451_IC1.8 XTX1_USB451_L3.1
NetXTX1_USB452_C2_2: XTX1_USB452_C2.2 XTX1_USB452_IC1.5 XTX1_USB452_L1.1
NetXTX1_USB452_C3_2: XTX1_USB452_C3.2 XTX1_USB452_IC1.8 XTX1_USB452_L3.1
NetXTX1_VGA1_FB6_3_2: XTX1_VGA1_FB6_3.2 XTX1_VGA1_VGA6_0.9
NetXTX1_VGA2_FB6_3_2: XTX1_VGA2_FB6_3.2 XTX1_VGA2_VGA6_0.9
NetXTX11_BATT1_+: XTX11_BATT1.+ XTX11_D*1.1
NetXTX11_C16_2: XTX11_C16.2 XTX11_D*1.3 XTX11_R8.2
NetXTX11_R8_1: XTX11_R8.1 XTX11_XTX.308
NetXTX12_BATT1_+: XTX12_BATT1.+ XTX12_D*1.1
NetXTX12_C16_2: XTX12_C16.2 XTX12_D*1.3 XTX12_R8.2
NetXTX12_R8_1: XTX12_R8.1 XTX12_XTX.308
VCC: "Power In.2" "Power In.3" "Power In.7" "Power In.8" "XTX2_RS232 1.1" "XTX2_RS232 2.1" "XTX2_TTL Serial 1.1" "XTX2_TTL Serial 1.2" "XTX2_TTL Serial 2.1" "XTX2_TTL Serial 2.2" "XTX13_RS232 1.1" "XTX13_RS232 2.1" "XTX13_TTL Serial 1.1" "XTX13_TTL Serial 1.2" "XTX13_TTL Serial 2.1" "XTX13_TTL Serial 2.2" XTX1_USB011_C1.2 XTX1_USB011_IC1.1 XTX1_USB011_IC1.4 XTX1_USB011_IC1.7 XTX1_USB011_TVS1.4 XTX1_USB011_TVS2.1 XTX1_USB012_C1.2 XTX1_USB012_IC1.1 XTX1_USB012_IC1.4 XTX1_USB012_IC1.7 XTX1_USB012_TVS1.4 XTX1_USB012_TVS2.1 XTX1_USB231_C1.2 XTX1_USB231_IC1.1 XTX1_USB231_IC1.4 XTX1_USB231_IC1.7 XTX1_USB231_TVS1.4 XTX1_USB231_TVS2.1 XTX1_USB232_C1.2 XTX1_USB232_IC1.1 XTX1_USB232_IC1.4 XTX1_USB232_IC1.7 XTX1_USB232_TVS1.4 XTX1_USB232_TVS2.1 XTX1_USB451_C1.2 XTX1_USB451_IC1.1 XTX1_USB451_IC1.4 XTX1_USB451_IC1.7 XTX1_USB451_TVS1.4 XTX1_USB451_TVS2.1 XTX1_USB452_C1.2 XTX1_USB452_IC1.1 XTX1_USB452_IC1.4 XTX1_USB452_IC1.7 XTX1_USB452_TVS1.4 XTX1_USB452_TVS2.1 XTX2_I2C.1 XTX2_IL_SATA#.1 XTX13_I2C.1 XTX13_IL_SATA#.1
XTX1_Interface1_PWGIN: XTX1_Interface1_Power.1 XTX1_Interface1_Power.2 XTX11_XTX.304
XTX1_Interface1_PWRBTN#: XTX1_Interface1_Reset.1 XTX1_Interface1_Reset.2 XTX11_XTX.307
XTX1_Interface2_PWGIN: XTX1_Interface2_Power.1 XTX1_Interface2_Power.2 XTX12_XTX.304
XTX1_Interface2_PWRBTN#: XTX1_Interface2_Reset.1 XTX1_Interface2_Reset.2 XTX12_XTX.307
XTX1_SATA1_SATAIN_RX_N: XTX1_SATA1_SATA4_0.S5 XTX11_XTX.106
XTX1_SATA1_SATAIN_RX_P: XTX1_SATA1_SATA4_0.S6 XTX11_XTX.104
XTX1_SATA1_SATAIN_TX_N: XTX1_SATA1_SATA4_0.S3 XTX11_XTX.110
XTX1_SATA1_SATAIN_TX_P: XTX1_SATA1_SATA4_0.S2 XTX11_XTX.112
XTX1_SATA2_SATAIN_RX_N: XTX1_SATA2_SATA4_0.S5 XTX12_XTX.106
XTX1_SATA2_SATAIN_RX_P: XTX1_SATA2_SATA4_0.S6 XTX12_XTX.104
XTX1_SATA2_SATAIN_TX_N: XTX1_SATA2_SATA4_0.S3 XTX12_XTX.110
XTX1_SATA2_SATAIN_TX_P: XTX1_SATA2_SATA4_0.S2 XTX12_XTX.112
XTX1_Serial_Drvs1_IN_RX1: "XTX13_TTL Serial 1.4" XTX1_Serial_Drvs1_U1.12
XTX1_Serial_Drvs1_IN_RX2: "XTX13_TTL Serial 2.4" XTX1_Serial_Drvs1_U1.9
XTX1_Serial_Drvs1_IN_TX1: "XTX13_TTL Serial 1.6" XTX1_Serial_Drvs1_U1.11
XTX1_Serial_Drvs1_IN_TX2: "XTX13_TTL Serial 2.6" XTX1_Serial_Drvs1_U1.10
XTX1_Serial_Drvs1_OUT_RX1: "XTX13_RS232 1.2" XTX1_Serial_Drvs1_U1.13
XTX1_Serial_Drvs1_OUT_RX2: "XTX13_RS232 2.2" XTX1_Serial_Drvs1_U1.8
XTX1_Serial_Drvs1_OUT_TX1: "XTX13_RS232 1.3" XTX1_Serial_Drvs1_U1.14
XTX1_Serial_Drvs1_OUT_TX2: "XTX13_RS232 2.3" XTX1_Serial_Drvs1_U1.7
XTX1_Serial_Drvs2_IN_RX1: "XTX2_TTL Serial 1.4" XTX1_Serial_Drvs2_U1.12
XTX1_Serial_Drvs2_IN_RX2: "XTX2_TTL Serial 2.4" XTX1_Serial_Drvs2_U1.9
XTX1_Serial_Drvs2_IN_TX1: "XTX2_TTL Serial 1.6" XTX1_Serial_Drvs2_U1.11
XTX1_Serial_Drvs2_IN_TX2: "XTX2_TTL Serial 2.6" XTX1_Serial_Drvs2_U1.10
XTX1_Serial_Drvs2_OUT_RX1: "XTX2_RS232 1.2" XTX1_Serial_Drvs2_U1.13
XTX1_Serial_Drvs2_OUT_RX2: "XTX2_RS232 2.2" XTX1_Serial_Drvs2_U1.8
XTX1_Serial_Drvs2_OUT_TX1: "XTX2_RS232 1.3" XTX1_Serial_Drvs2_U1.14
XTX1_Serial_Drvs2_OUT_TX2: "XTX2_RS232 2.3" XTX1_Serial_Drvs2_U1.7
XTX1_USB011_OUT_USBA_5V: XTX1_USB011_C7.2 XTX1_USB011_L1.2 XTX13_USB1.1
XTX1_USB011_OUT_USBA_GND: XTX1_USB011_C6.2 XTX1_USB011_L2.2 XTX13_USB1.5 XTX13_USB1.CGND
XTX1_USB011_OUT_USBA_N: XTX1_USB011_TVS1.2 XTX11_XTX.76 XTX13_USB1.2
XTX1_USB011_OUT_USBA_P: XTX1_USB011_TVS1.3 XTX11_XTX.88 XTX13_USB1.3
XTX1_USB011_OUT_USBB_5V: XTX1_USB011_C5.2 XTX1_USB011_L3.2 XTX13_USB2.1
XTX1_USB011_OUT_USBB_GND: XTX1_USB011_C4.2 XTX1_USB011_L4.2 XTX13_USB2.5 XTX13_USB2.CGND
XTX1_USB011_OUT_USBB_N: XTX1_USB011_TVS2.2 XTX11_XTX.80 XTX13_USB2.2 | length 1035.1
  Top Layer w6: 696.85,3421.26 759.84,3358.27 795.27,3358.27 ; XTX11_XTX.80@774.61,3005.91 814.96,3005.91 879.92,3070.87 905.51,3070.87 926.47,3091.83 926.47,3305.81 874.02,3358.27 795.27,3358.27 ; 791.34,3358.27 795.27,3358.27
  Bottom Layer w6: 354.33,3397.64 433.07,3397.64 456.69,3421.26 696.85,3421.26
XTX1_USB011_OUT_USBB_P: XTX1_USB011_TVS2.3 XTX11_XTX.92 XTX13_USB2.3 | length 524
  Top Layer w6: XTX11_XTX.92@774.61,3147.64 812.99,3147.64 877.95,3082.68 900.23,3082.68 915.35,3097.8 915.35,3301.18 870.08,3346.46 787.4,3346.46
XTX1_USB012_OUT_USBA_5V: XTX1_USB012_C7.2 XTX1_USB012_L1.2 XTX2_USB1.1
XTX1_USB012_OUT_USBA_GND: XTX1_USB012_C6.2 XTX1_USB012_L2.2 XTX2_USB1.5 XTX2_USB1.CGND
XTX1_USB012_OUT_USBA_N: XTX1_USB012_TVS1.2 XTX2_USB1.2 XTX12_XTX.76
XTX1_USB012_OUT_USBA_P: XTX1_USB012_TVS1.3 XTX2_USB1.3 XTX12_XTX.88
XTX1_USB012_OUT_USBB_5V: XTX1_USB012_C5.2 XTX1_USB012_L3.2 XTX2_USB2.1
XTX1_USB012_OUT_USBB_GND: XTX1_USB012_C4.2 XTX1_USB012_L4.2 XTX2_USB2.5 XTX2_USB2.CGND
XTX1_USB012_OUT_USBB_N: XTX1_USB012_TVS2.2 XTX2_USB2.2 XTX12_XTX.80
XTX1_USB012_OUT_USBB_P: XTX1_USB012_TVS2.3 XTX2_USB2.3 XTX12_XTX.92
XTX1_USB231_OUT_USBA_5V: XTX1_USB231_C7.2 XTX1_USB231_L1.2 XTX13_USB3.1
XTX1_USB231_OUT_USBA_GND: XTX1_USB231_C6.2 XTX1_USB231_L2.2 XTX13_USB3.5 XTX13_USB3.CGND
XTX1_USB231_OUT_USBA_N: XTX1_USB231_TVS1.2 XTX11_XTX.58 XTX13_USB3.2
XTX1_USB231_OUT_USBA_P: XTX1_USB231_TVS1.3 XTX11_XTX.66 XTX13_USB3.3
XTX1_USB231_OUT_USBB_5V: XTX1_USB231_C5.2 XTX1_USB231_L3.2 XTX13_USB4.1
XTX1_USB231_OUT_USBB_GND: XTX1_USB231_C4.2 XTX1_USB231_L4.2 XTX13_USB4.5 XTX13_USB4.CGND
XTX1_USB231_OUT_USBB_N: XTX1_USB231_TVS2.2 XTX11_XTX.62 XTX13_USB4.2
XTX1_USB231_OUT_USBB_P: XTX1_USB231_TVS2.3 XTX11_XTX.72 XTX13_USB4.3
XTX1_USB232_OUT_USBA_5V: XTX1_USB232_C7.2 XTX1_USB232_L1.2 XTX2_USB3.1
XTX1_USB232_OUT_USBA_GND: XTX1_USB232_C6.2 XTX1_USB232_L2.2 XTX2_USB3.5 XTX2_USB3.CGND
XTX1_USB232_OUT_USBA_N: XTX1_USB232_TVS1.2 XTX2_USB3.2 XTX12_XTX.58
XTX1_USB232_OUT_USBA_P: XTX1_USB232_TVS1.3 XTX2_USB3.3 XTX12_XTX.66
XTX1_USB232_OUT_USBB_5V: XTX1_USB232_C5.2 XTX1_USB232_L3.2 XTX2_USB4.1
XTX1_USB232_OUT_USBB_GND: XTX1_USB232_C4.2 XTX1_USB232_L4.2 XTX2_USB4.5 XTX2_USB4.CGND